# Altium PCB ПП.PcbDoc
Units mm, origin at the board's own origin, x right, y up, seen from the top; angles counter-clockwise.
Board outline 152.4 x 101.6 mm, 2 copper layers (Top Layer, Bottom Layer); 121 components, 10 nets, 40 pads, 0 vias.
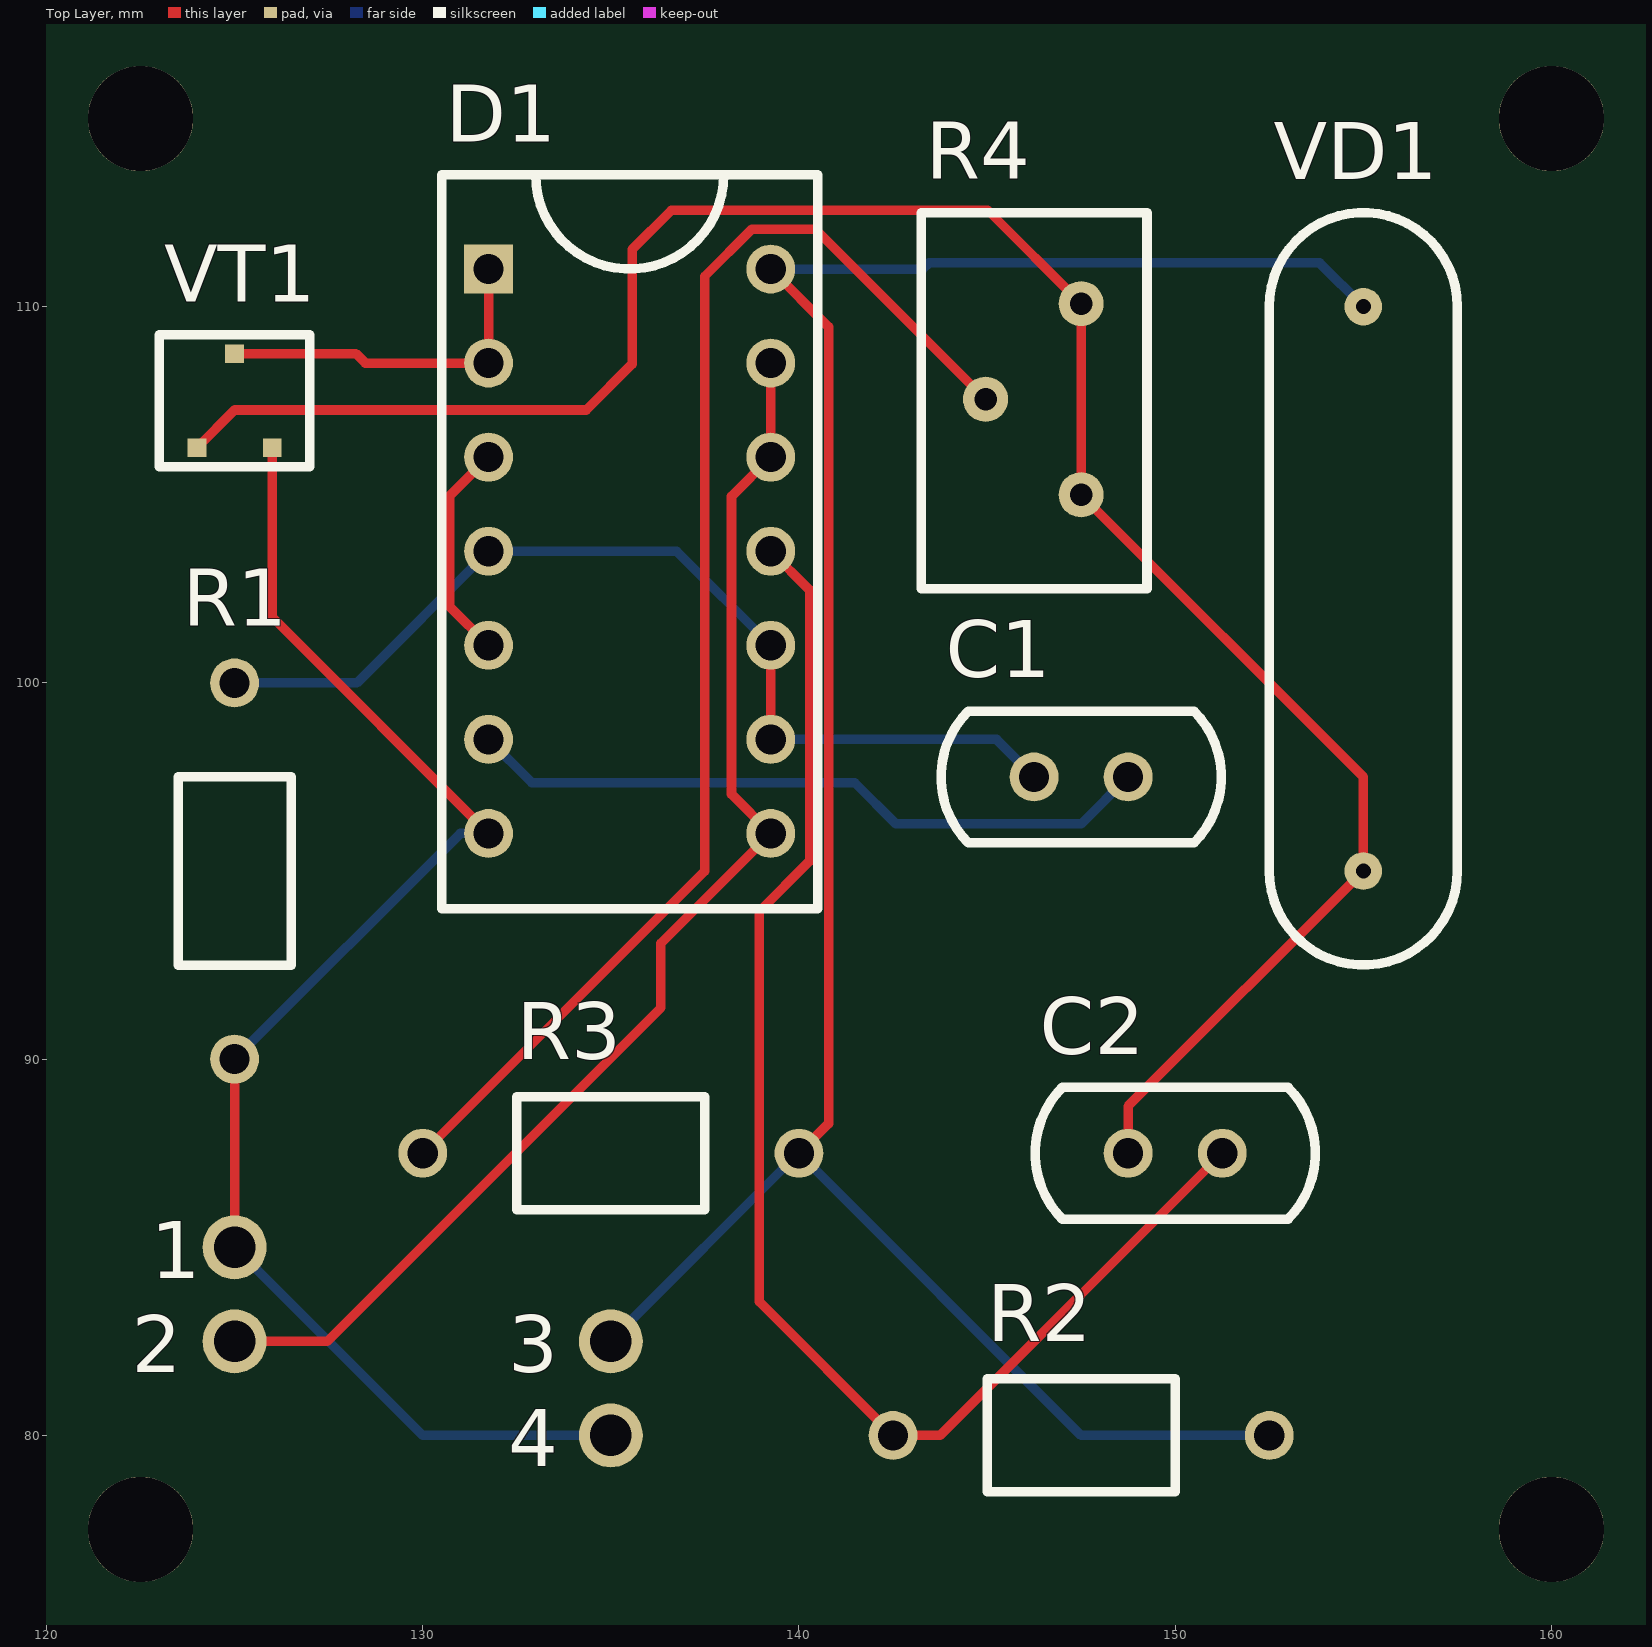
[diagram p0: Top Layer view]
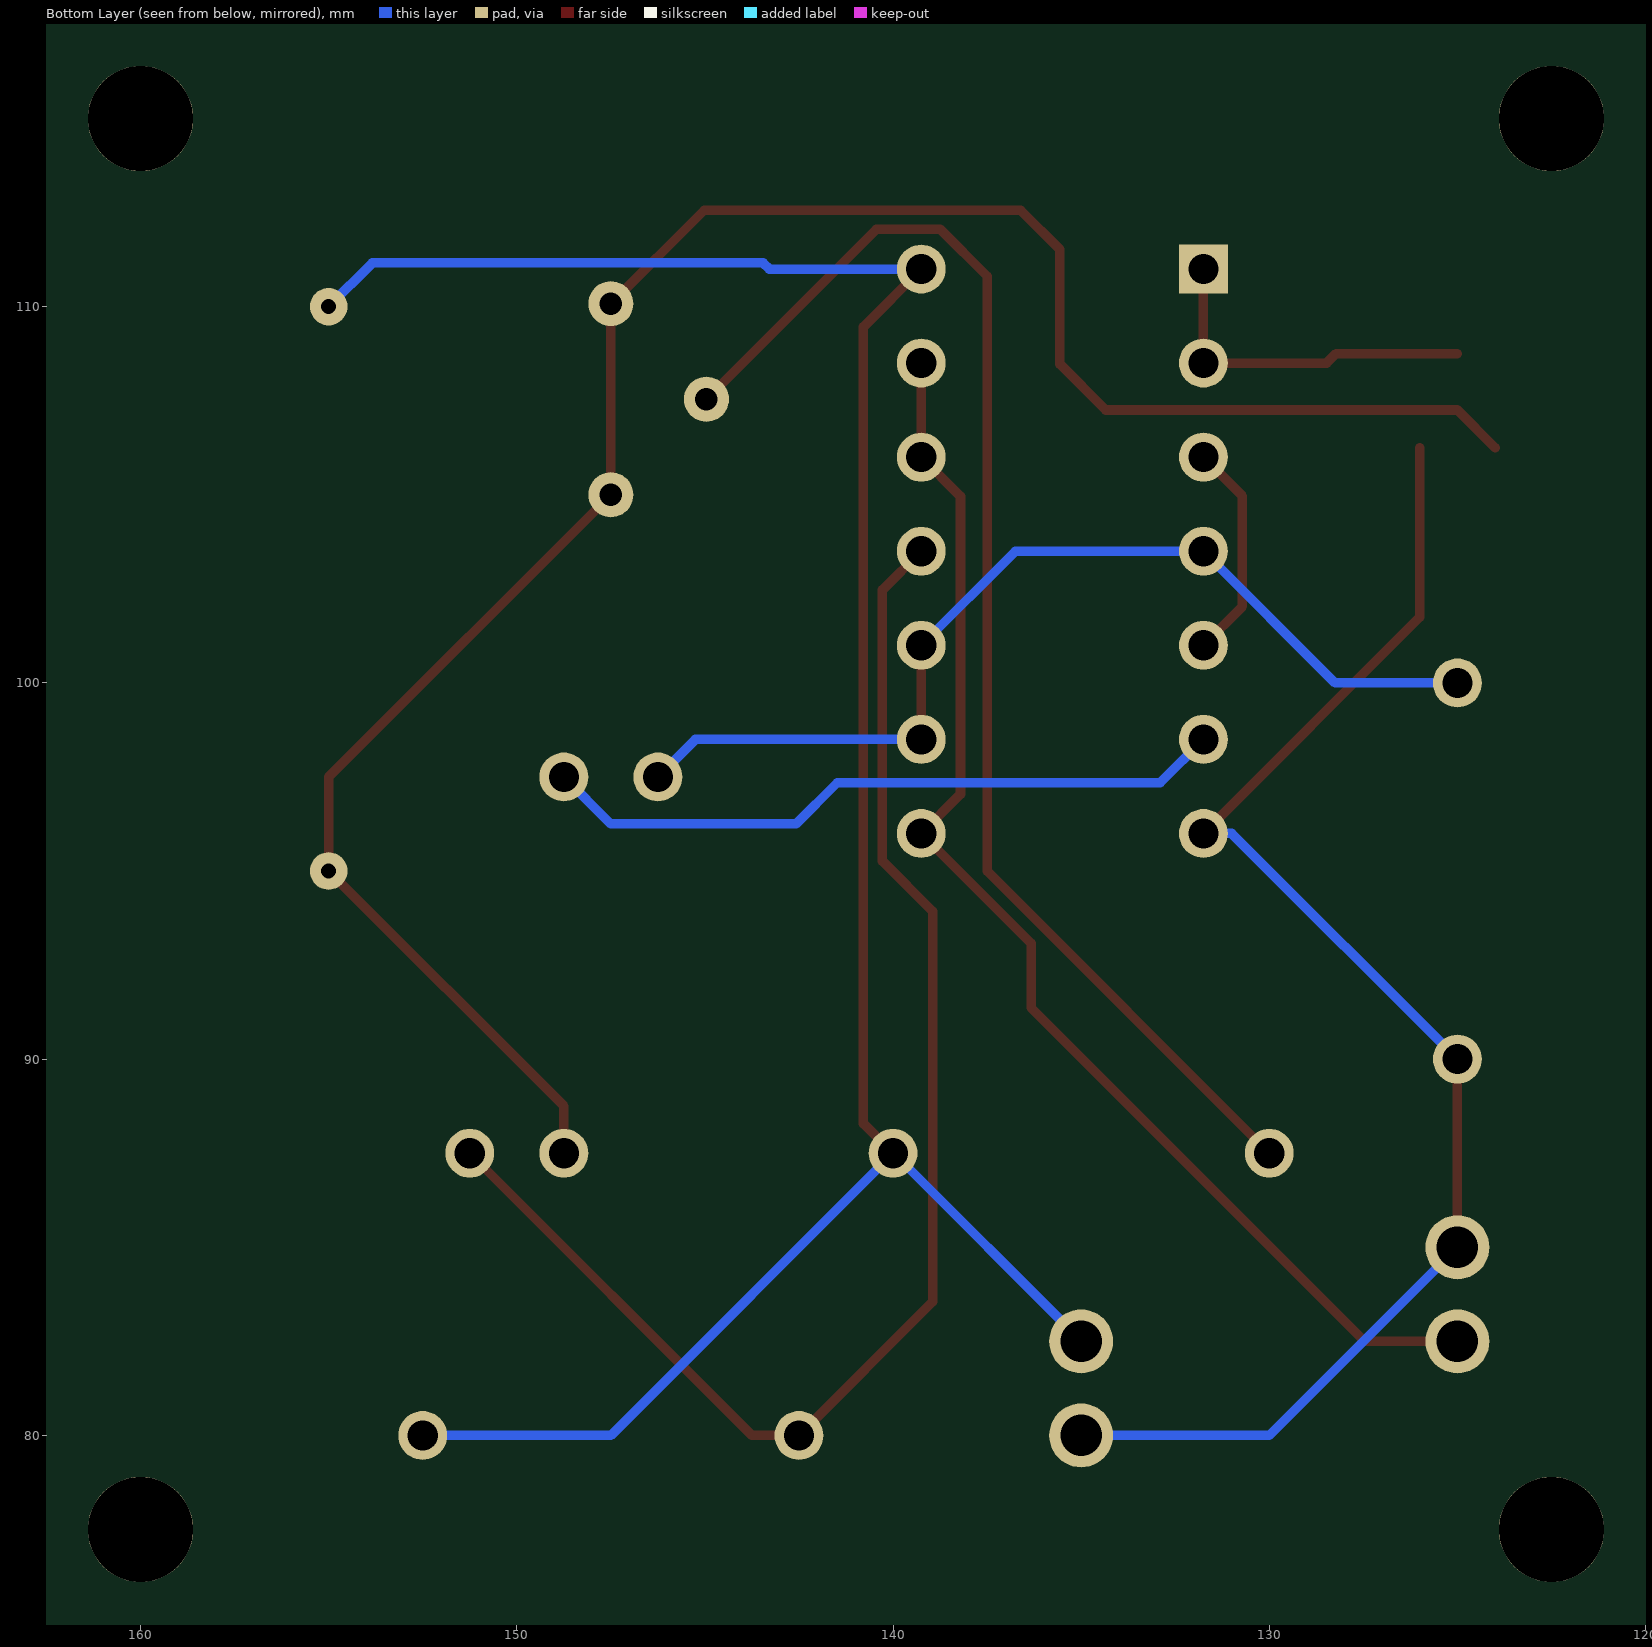
[diagram p1: Bottom Layer view, seen from below]

## Layer stack, top to bottom
Top Solder: solder mask 0.0102, Solder Resist, Dk 3.5
Top Layer: signal copper 0.0356
Dielectric 1: dielectric 0.32, FR-4, Dk 4.8
Bottom Layer: signal copper 0.0356
Bottom Solder: solder mask 0.0102, Solder Resist, Dk 3.5

## Board outline
25.4,25.4 177.8,25.4 177.8,127 25.4,127

## Design rules (kind name [scope] priority, off if disabled: settings)
Clearance [All] p1: gap=0.254
PolygonConnect [All] p1: connectstyle=Relief reliefconductorwidth=0.254 reliefentries=4 polygonreliefangle="90 Angle" airgapwidth=0.254
RoomDefinition Schema [InComponentClass('Schema')] p1: confinementstyle=ConfineIn formatcopy=TRUE lockcomponents=FALSE outline 120,75 162.5,75 162.5,117.5 120,117.5
RoutingVias [All] p1: holewidth=0.711 width=1.27 viastyle="Through Hole" minholewidth=0.711 minwidth=1.27 maxholewidth=0.711 maxwidth=1.27
SolderMaskExpansion [All] p1: expansion=0.102
Width [All] p1: maxlimit=0.254 minlimit=0.254 preferedwidth=0.254
30 further rules are at their usual default settings.

## Classes and differential pairs
component class Schema: 1 2 3 4 C1 C2 D1 R1 R2 R3 R4 VD1 VT1

## Components (designator, comment, footprint, x,y, rotation, side; value= is the part's Value field where it differs from the comment)
1 "Point" Point 125,85 r90 top
2 "2" Point 125,82.5 r90 top
3 "Point" Point 135,82.5 r90 top
4 "Point" Point 135,80 r90 top
C1 "С постоянный" B37986-N 147.5,97.5 r180 top
C2 "С постоянный" B37986-N 150,87.5 r180 top
D1 "name" К155ЛА3 135,105 r0 top
Designator1 "Comment" UNIT_DISC 286,288 r0 top
Designator1 "Comment" UNIT_DISC 286,585 r0 top
Designator1 "Comment" UNIT_DISC 286,585 r0 top
Designator1 "Comment" UNIT_DISC 496,585 r0 top
Designator1 "Comment" UNIT_DISC 496,585 r0 top
Designator1 "Comment" UNIT_DISC 496,288 r0 top
Designator1 "Comment" UNIT_DISC 496,288 r0 top
Designator1 "Comment" UNIT_DISC 286,288 r0 top
Designator1 "Comment" UNIT_DISC 306,293 r0 top
Designator1 "Comment" UNIT_DISC 306,580 r0 top
Designator1 "Comment" UNIT_DISC 306,580 r0 top
Designator1 "Comment" UNIT_DISC 491,580 r0 top
Designator1 "Comment" UNIT_DISC 491,580 r0 top
Designator1 "Comment" UNIT_DISC 491,293 r0 top
Designator1 "Comment" UNIT_DISC 491,293 r0 top
Designator1 "Comment" UNIT_DISC 306,293 r0 top
Designator1 "Comment" UNIT_DISC 306,293 r0 top
Designator1 "Comment" UNIT_DISC 294,293 r0 top
Designator1 "Comment" UNIT_DISC 294,293 r0 top
Designator1 "Comment" UNIT_DISC 294,438 r0 top
Designator1 "Comment" UNIT_DISC 294,438 r0 top
Designator1 "Comment" UNIT_DISC 306,438 r0 top
Designator1 "Comment" UNIT_DISC 299,438 r0 top
Designator1 "Comment" UNIT_DISC 299,293 r0 top
Designator1 "Comment" UNIT_DISC 294,318 r0 top
Designator1 "Comment" UNIT_DISC 306,318 r0 top
Designator1 "Comment" UNIT_DISC 294,353 r0 top
Designator1 "Comment" UNIT_DISC 306,353 r0 top
Designator1 "Comment" UNIT_DISC 294,378 r0 top
Designator1 "Comment" UNIT_DISC 306,378 r0 top
Designator1 "Comment" UNIT_DISC 294,403 r0 top
Designator1 "Comment" UNIT_DISC 306,403 r0 top
Designator1 "Comment" UNIT_DISC 306,293 r0 top
Designator1 "Comment" UNIT_DISC 306,348 r0 top
Designator1 "Comment" UNIT_DISC 306,348 r0 top
Designator1 "Comment" UNIT_DISC 491,348 r0 top
Designator1 "Comment" UNIT_DISC 371,293 r0 top
Designator1 "Comment" UNIT_DISC 371,356 r0 top
Designator1 "Comment" UNIT_DISC 371,356 r0 top
Designator1 "Comment" UNIT_DISC 491,356 r0 top
Designator1 "Comment" UNIT_DISC 491,333 r0 top
Designator1 "Comment" UNIT_DISC 371,333 r0 top
Designator1 "Comment" UNIT_DISC 371,308 r0 top
Designator1 "Comment" UNIT_DISC 491,308 r0 top
Designator1 "Comment" UNIT_DISC 441,293 r0 top
Designator1 "Comment" UNIT_DISC 441,333 r0 top
Designator1 "Comment" UNIT_DISC 441,328 r0 top
Designator1 "Comment" UNIT_DISC 491,328 r0 top
Designator1 "Comment" UNIT_DISC 491,313 r0 top
Designator1 "Comment" UNIT_DISC 441,313 r0 top
Designator1 "Comment" UNIT_DISC 456,313 r0 top
Designator1 "Comment" UNIT_DISC 456,333 r0 top
Designator1 "Comment" UNIT_DISC 473,333 r0 top
Designator1 "Comment" UNIT_DISC 473,313 r0 top
Designator1 "Comment" UNIT_DISC 461,313 r0 top
Designator1 "Comment" UNIT_DISC 461,308 r0 top
Designator1 "Comment" UNIT_DISC 361,293 r0 top
Designator1 "Comment" UNIT_DISC 361,348 r0 top
Designator1 "Comment" UNIT_DISC 346,348 r0 top
Designator1 "Comment" UNIT_DISC 346,293 r0 top
Designator1 "Comment" UNIT_DISC 323,293 r0 top
Designator1 "Comment" UNIT_DISC 323,348 r0 top
Designator1 "Comment" UNIT_DISC 313,348 r0 top
Designator1 "Comment" UNIT_DISC 313,323 r0 top
Designator1 "Comment" UNIT_DISC 306,323 r0 top
Designator1 "Comment" UNIT_DISC 371,323 r0 top
Designator1 "Comment" UNIT_DISC 371,328 r0 top
Designator1 "Comment" UNIT_DISC 306,328 r0 top
Designator1 "Comment" UNIT_DISC 306,333 r0 top
Designator1 "Comment" UNIT_DISC 371,333 r0 top
Designator1 "Comment" UNIT_DISC 306,338 r0 top
Designator1 "Comment" UNIT_DISC 371,338 r0 top
Designator1 "Comment" UNIT_DISC 306,343 r0 top
Designator1 "Comment" UNIT_DISC 371,343 r0 top
Designator1 "Comment" UNIT_DISC 306,298 r0 top
Designator1 "Comment" UNIT_DISC 371,298 r0 top
Designator1 "Comment" UNIT_DISC 306,303 r0 top
Designator1 "Comment" UNIT_DISC 371,303 r0 top
Designator1 "Comment" UNIT_DISC 306,308 r0 top
Designator1 "Comment" UNIT_DISC 371,308 r0 top
Designator1 "Comment" UNIT_DISC 306,313 r0 top
Designator1 "Comment" UNIT_DISC 371,313 r0 top
Designator1 "Comment" UNIT_DISC 306,318 r0 top
Designator1 "Comment" UNIT_DISC 371,318 r0 top
Designator1 "Comment" UNIT_DISC 446,313 r0 top
Designator1 "Comment" UNIT_DISC 446,328 r0 top
Designator1 "Comment" UNIT_DISC 451,313 r0 top
Designator1 "Comment" UNIT_DISC 451,328 r0 top
Designator1 "Comment" UNIT_DISC 306,566 r0 top
Designator1 "Comment" UNIT_DISC 443,566 r0 top
Designator1 "Comment" UNIT_DISC 443,566 r0 top
Designator1 "Comment" UNIT_DISC 443,580 r0 top
Designator1 "Comment" UNIT_DISC 443,573 r0 top
Designator1 "Comment" UNIT_DISC 390,573 r0 top
Designator1 "Comment" UNIT_DISC 390,580 r0 top
Designator1 "Comment" UNIT_DISC 390,566 r0 top
Designator1 "Comment" UNIT_DISC 376,566 r0 top
Designator1 "Comment" UNIT_DISC 376,580 r0 top
Designator1 "Comment" UNIT_DISC 306,580 r0 top
Designator1 "Comment" UNIT_DISC 294,580 r0 top
Designator1 "Comment" UNIT_DISC 294,580 r0 top
Designator1 "Comment" UNIT_DISC 294,460 r0 top
Designator1 "Comment" UNIT_DISC 294,460 r0 top
Designator1 "Comment" UNIT_DISC 306,460 r0 top
Designator1 "Comment" UNIT_DISC 299,460 r0 top
Designator1 "Comment" UNIT_DISC 299,580 r0 top
Designator1 "Comment" UNIT_DISC 294,520 r0 top
Designator1 "Comment" UNIT_DISC 306,520 r0 top
R1 "R_0.125_10" "R_ 0,125_10" 125,95 r90 top
R2 "R_0,125_10" "R_ 0,125_10" 147.5,80 r0 top
R3 "R_0,125_10" "R_ 0,125_10" 135,87.5 r0 top
R4 "R регулируемый" "R рег_BOURNS3296-3/8" 147.5,105 r90 top
VD1 "D" D9A 155,102.5 r90 top
VT1 "Tранзистор полевой с каналом P-типа" SOT223 125,107.5 r0 top

## Footprints (in the part's own frame and the unit in brackets; to place one, negate y for a bottom-side part, rotate by r counter-clockwise, add the part's x,y. Pads: shape width x height; smd on the part's side, far side on the other; paste and mask are expansions set on the pad)
B37986-N [mm]
  round 1.3 hole 0.8 unplated: 1(-1.25,0) 2(1.25,0)
  silkscreen extent -3.72,-1.75 3.72,1.75
D9A [mm]
  round 1 hole 0.4: 1(-7.5,0) 2(7.5,0)
  silkscreen extent -10,-2.5 10,2.5
Point [mm]
  round 1.7 hole 1.1 unplated: 1(0,0)
"R рег_BOURNS3296-3/8" [mm]
  round 1.2 hole 0.6: 1(5.08,0) 2(2.54,2.54) 3(0,0)
  silkscreen extent -2.5,-1.75 7.5,4.25
"R_ 0,125_10" [mm]
  round 1.3 hole 0.8 unplated: 1(-5,0) 2(5,0)
  silkscreen extent -2.5,-1.5 2.5,1.5
SOT223 [mm]
  rect 0.5x0.5 smd: 1(-1,-1.25) 2(0,1.25) 3(1,-1.25)
  silkscreen extent -2,-1.75 2,1.75
UNIT_DISC [mm]
К155ЛА3 [mm]
  rect 1.3x1.3 hole 0.8: 1(-3.25,6)
  round 1.3 hole 0.8: 2(-3.25,3.5) 3(-3.25,1) 4(-3.25,-1.5) 5(-3.25,-4) 6(-3.25,-6.5) 7(-3.25,-9) 8(4.25,-9) 9(4.25,-6.5) 10(4.25,-4) 11(4.25,-1.5) 12(4.25,1) 13(4.25,3.5) 14(4.25,6)
  silkscreen extent -4.5,-11 5.5,8.5

## Part data
2: library part Point
D1: library part К155ЛА3_ПМ

## Free pads (board coordinates)
  round 2.8 hole 2.8 unplated: 1(122.5,115) 2(160,115) 3(160,77.5) 4(122.5,77.5)

## Nets (pads, with @x,y where several pads share a name; then routed paths per layer and width w, separated by ;. In a path a pad name is that pad's centre, name@x,y a point inside that pad or via, vN(x,y) a via of type N, cw(c..) or ccw(c..) an arc to the next point about the centre after c; other vN are vias at no path point)
GND: 1.1 4.1 D1.7 R1.1 VT1.3 | length 38.9
  Top Layer w0.254: 1.1 R1.1 ; VT1.3 126,101.75 D1.7
  Bottom Layer w0.254: 1.1 130,80 4.1 ; R1.1 131,96 D1.7
NetC1_1: C1.1 D1.6 | length 18.4
  Bottom Layer w0.254: D1.6 132.903,97.347 141.484,97.347 142.577,96.254 147.504,96.254 C1.1
NetC1_2: C1.2 D1.4 D1.9 D1.10 R1.2 | length 26.6
  Top Layer w0.254: D1.9 D1.10
  Bottom Layer w0.254: R1.2 128.25,100 D1.4 136.75,103.5 D1.10 ; D1.9 145.25,98.5 C1.2
NetC2_1: C2.1 D1.11 R2.1 | length 37.8
  Top Layer w0.254: D1.11 140.281,102.469 140.281,95.264 138.944,93.927 138.944,83.556 R2.1 143.75,80 C2.1
NetC2_2: C2.2 R4.1 R4.3 VD1.1 VT1.1 | length 57.2
  Top Layer w0.254: VT1.1 125.003,107.253 134.346,107.253 135.566,108.472 135.566,111.52 136.607,112.561 145.019,112.561 R4.1 R4.3 155,97.5 VD1.1 148.75,88.75 C2.2
NetD1_1: D1.1 D1.2 VT1.2 | length 9.4
  Top Layer w0.254: VT1.2 128.225,108.75 128.475,108.5 D1.2 D1.1
NetD1_3: D1.3 D1.5 | length 5.9
  Top Layer w0.254: D1.5 130.714,102.036 130.714,104.964 D1.3
NetR3_1: R3.1 R4.2 | length 36.3
  Top Layer w0.254: R3.1 137.496,94.996 137.496,110.809 138.741,112.053 140.447,112.053 R4.2
Выход: 2.1 D1.8 D1.12 D1.13 | length 34.2
  Top Layer w0.254: 2.1 127.463,82.5 136.328,91.365 136.328,93.078 D1.8 138.207,97.043 138.207,104.957 D1.12 D1.13
"Питание (+5V)": 3.1 D1.14 R2.2 R3.2 VD1.2 | length 63.5
  Top Layer w0.254: D1.14 140.789,109.461 140.789,88.289 R3.2
  Bottom Layer w0.254: 3.1 135,82.519 139.981,87.5 R3.2 147.5,80 R2.2 ; D1.14 143.287,111 143.452,111.164 153.836,111.164 VD1.2

## Silkscreen, mask and mechanical layers (free items; w line width, h text height)
Mechanical 1:
  lines w0.2: 306,298 371,298 ; 306,303 371,303 ; 306,308 371,308 ; 306,313 371,313 ; 306,318 371,318 ; 306,333 371,333 ; 306,338 371,338 ; 306,343 371,343 ; 446,313 446,328 ; 451,313 451,328 ; 286,288 286,585 496,585 496,288 286,288
  lines w0.5: 294,318 306,318 ; 294,353 306,353 ; 294,378 306,378 ; 294,403 306,403 ; 294,520 306,520 ; 299,293 299,438 ; 299,460 299,580 ; 306,323 371,323 ; 306,328 371,328 ; 306,438 294,438 294,293 306,293 ; 306,460 294,460 294,580 306,580 ; 306,566 443,566 443,580 ; 313,323 313,348 ; 323,293 323,348 ; 346,293 346,348 ; 361,293 361,348 ; 371,293 371,356 491,356 ; 371,308 491,308 ; 371,333 491,333 ; 376,566 376,580 ; 390,566 390,580 ; 390,573 443,573 ; 441,293 441,333 ; 441,313 491,313 ; 441,328 491,328 ; 456,313 456,333 ; 461,308 461,313 ; 473,313 473,333 ; 491,348 306,348 306,293 ; 306,293 306,580 ; 306,293 491,293 491,580 306,580
  text "Перв.примен." at 297.906,540.339 h2.03 r90
  text "М.экспертиза" at 291.406,528.158 h2.03 r90
  text "Справ.N" at 297.906,484.194 h2.03 r90
  text "Подп.и дата" at 297.906,411.519 h2.03 r90
  text "Инв.N дубл." at 297.906,382.109 h2.03 r90
  text "Взам.инв.N" at 297.906,357.426 h2.03 r90
  text "Лит." at 444.552,329.094 h2.03
  text "Масса" at 460.055,329.094 h2.03
  text "Масштаб" at 475.332,329.094 h2.03
  text "Подп.и дата" at 297.906,326.519 h2.03 r90
  text "Изм" at 306.688,324.094 h2.03
  text "Лист" at 314.689,324.094 h2.03
  text "N докум." at 328.195,324.094 h2.03
  text "Подп." at 349.418,324.094 h2.03
  text "Дата" at 362.371,324.094 h2.03
  text "Разраб." at 306.8,319.094 h2.03
  text "Пров." at 306.8,314.094 h2.03
  text "Т.контр." at 306.8,309.094 h2.03
  text "Лист  1" at 445.602,309.094 h2.03
  text "Листов" at 468.652,309.094 h2.03
  text "Н.контр." at 306.8,299.094 h2.03
  text "Инв.N подл." at 297.906,296.973 h2.03 r90
  text "Утв." at 306.8,294.094 h2.03
  text "Копировал" at 376,289.094 h2.03
  text "Формат A4" at 456,289.094 h2.03
Mechanical 3:
  lines w0.254: 97.5,77.5 100,75 ; 97.5,115 100,117.5 ; 102.5,77.5 100,75 ; 102.5,80 105,77.5 ; 102.5,112.5 105,115 ; 102.5,115 100,117.5 ; 107.5,80 105,77.5 ; 107.5,112.5 105,115 ; 112.5,80 117.5,80 ; 112.5,85 117.5,85 ; 112.5,90 117.5,90 ; 112.5,95 117.5,95 ; 112.5,100 117.5,100 ; 112.5,105 117.5,105 ; 112.5,110 117.5,110 ; 115,82.5 117.5,82.5 ; 115,87.5 117.5,87.5 ; 115,92.5 117.5,92.5 ; 115,102.5 117.5,102.5 ; 115,107.5 117.5,107.5 ; 115,112.5 117.5,112.5 ; 117.5,75 100,75 ; 117.5,77.5 105,77.5 ; 117.5,115 105,115 ; 117.5,117.5 100,117.5 ; 120,65 120,75 ; 122.5,67.5 122.5,75 ; 125,72.5 125,75 ; 127.5,70 127.5,75 ; 130,72.5 130,75 ; 132.5,70 132.5,75 ; 135,72.5 135,75 ; 137.5,70 137.5,75 ; 142.5,70 142.5,75 ; 145,72.5 145,75 ; 147.5,70 147.5,75 ; 150,72.5 150,75 ; 152.5,70 152.5,75 ; 155,72.5 155,75 ; 157.5,70 157.5,75 ; 160,67.5 160,75 ; 162.5,65 162.5,75 ; 100,75 100,117.5 ; 105,77.5 105,115 ; 105,115 105,115 ; 105,115 105,115 ; 115,97.5 117.5,97.5 115,97.5 ; 140,72.5 140,75 140,72.5
  text "40" at 110,115 h1.52
  text "35" at 110,110 h1.52
  text "30" at 110,105 h1.52
  text "25" at 110,100 h1.52
  text "20" at 110,95 h1.52
  text "15" at 110,90 h1.52
  text "10" at 110,85 h1.52
  text "5" at 110,80 h1.52
Mechanical 4:
  lines w0.254: 120,75 162.5,75 162.5,117.5 120,117.5 120,75